# Altium PCB flight_controller.PcbDoc (part 2 of 2)
Units mm, origin at the board's own origin, x right, y up, seen from the top; angles counter-clockwise.
Board outline 36.5 x 36.5 mm, 4 copper layers (Top Layer, GND, Power, Bottom Layer), stack 0.568 mm thick; 81 components, 78 nets, 350 pads, 113 vias.
Unrouted connection lines stored in the file: 37.
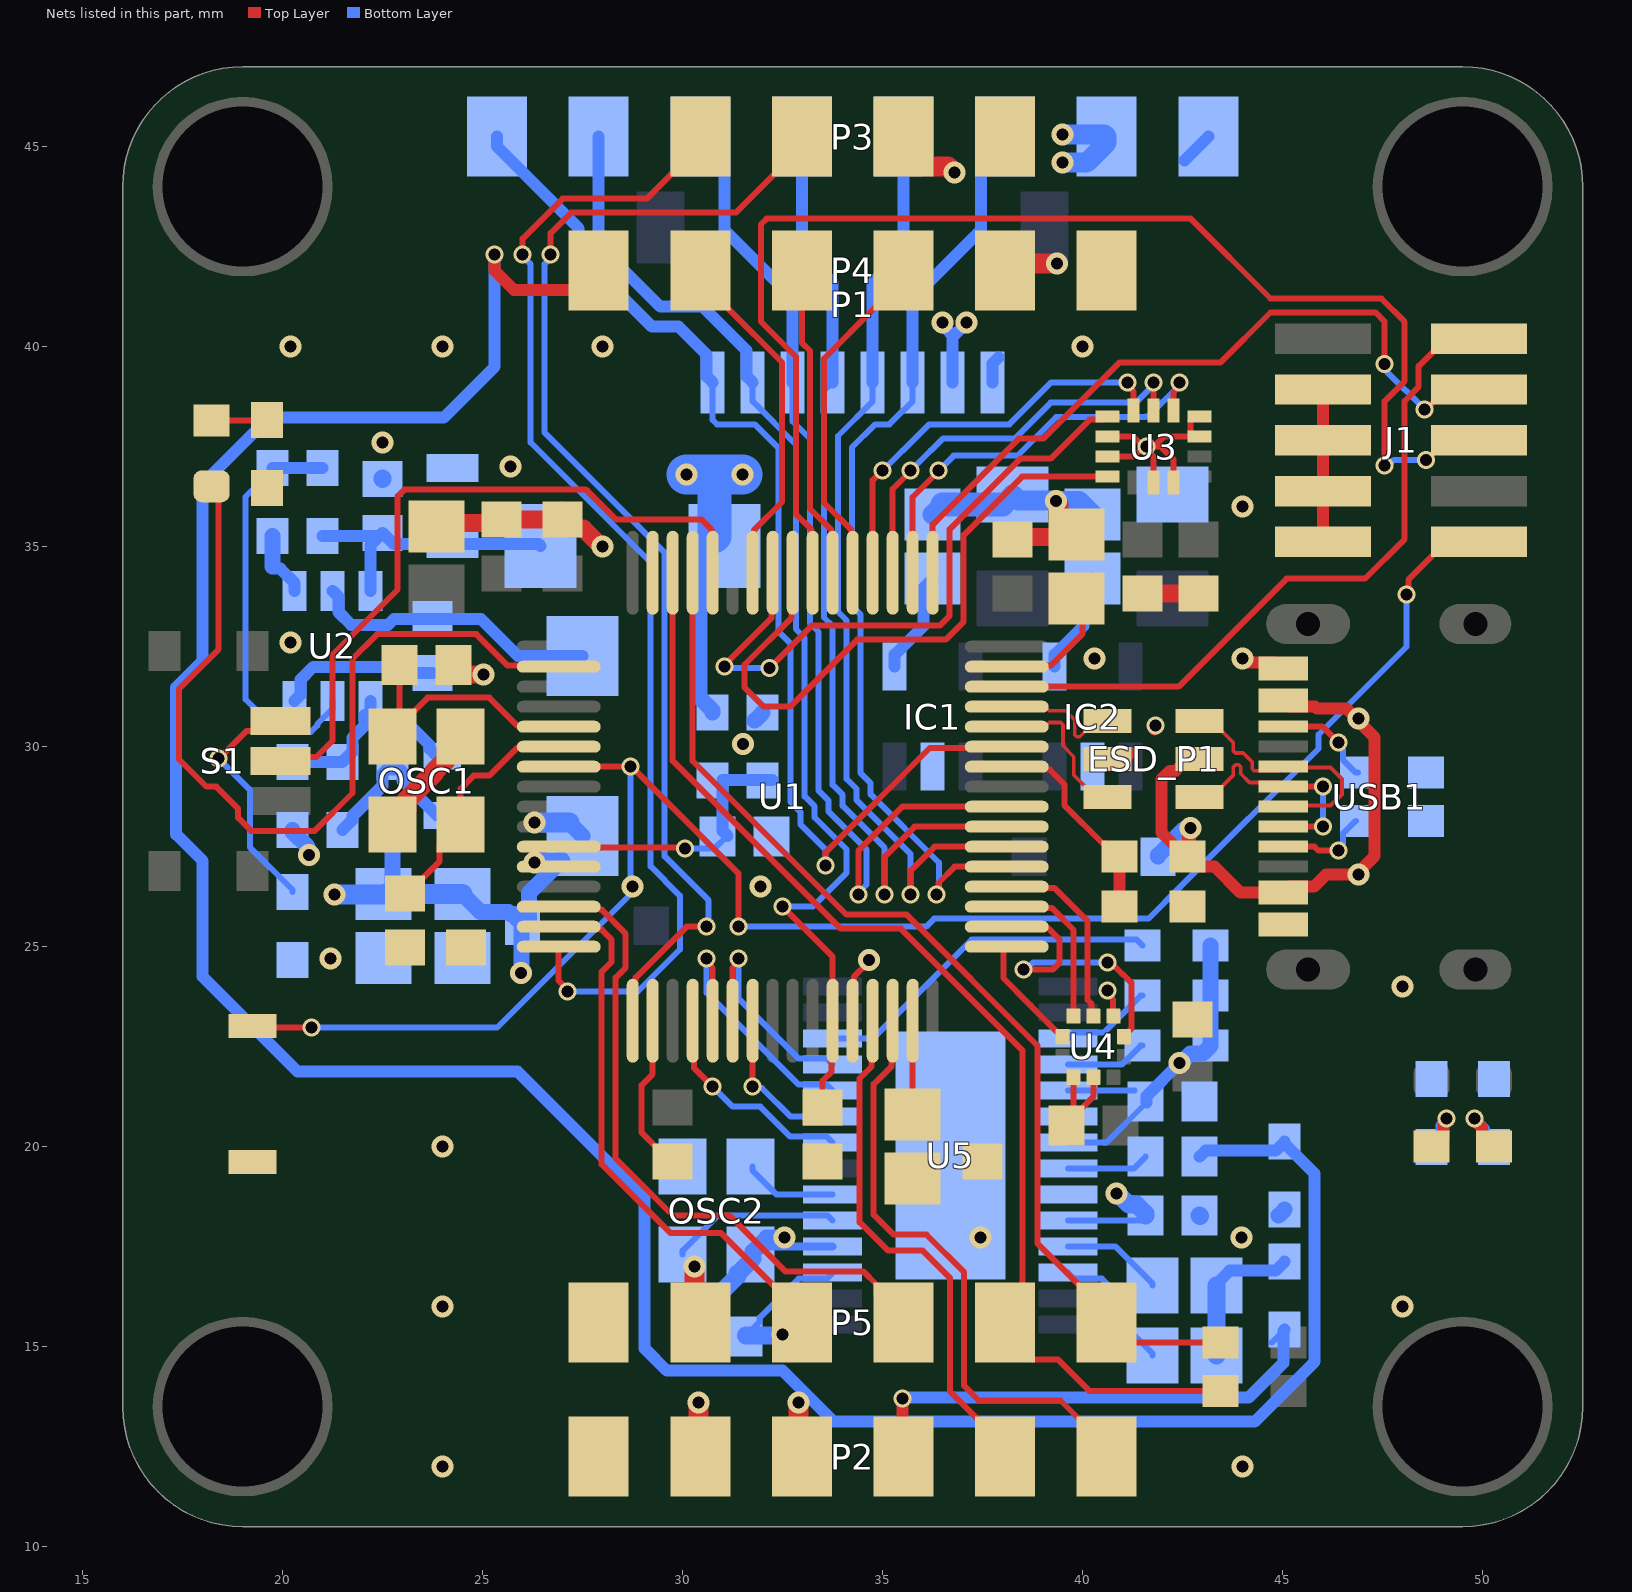
[diagram p4: the nets of this part, all layers, seen from the top]

## Via types
v1: diameter 0.45, hole 0.3, Top Layer to Bottom Layer, tented both sides, 44 vias
v2: diameter 0.55, hole 0.3, Top Layer to Bottom Layer, tented both sides, 25 vias
v3: diameter 0.55, hole 0.3, Top Layer to Power, tented both sides, 21 vias
v4: diameter 0.55, hole 0.3, Power to Bottom Layer, tented both sides, 18 vias
v5: diameter 0.55, hole 0.3, Top Layer to Bottom Layer, tented top, 2 vias
v6: diameter 0.55, hole 0.3, Top Layer to GND, tented both sides, 1 vias
v7: diameter 0.45, hole 0.3, Top Layer to GND, tented both sides, 1 vias
v8: diameter 0.55/0.55/0.55/0.55 (per signal layer), hole 0.3, Top Layer to Bottom Layer, tented both sides, 1 vias

## Nets (pads, with @x,y where several pads share a name; then routed paths per layer and width w, separated by ;. In a path a pad name is that pad's centre, name@x,y a point inside that pad or via, vN(x,y) a via of type N, cw(c..) or ccw(c..) an arc to the next point about the centre after c; other vN are vias at no path point) (continued)
+5V_Reg: C11.2 C12.2 C28.2 C31.1 C33.1 D3.1 L1.2 P2.5 P3.3 P4.5 P5.5 R2.2 R19.2 R20.2 R21.2 U5.3 U5.19 U5.21 U5.24 | length 33.2
  Top Layer w0.5: v3(30.3,17) 30.3,15.39 P5.5@30.356,15.334 ; P2.5@30.4,12.29 v3(30.4,13.6) ; P3.3@35.52,45.25 35.52,45 36.02,44.5 36.637,44.5 36.786,44.35 v3(36.8,44.35) ; P4.5@38.06,42.25 38.225,42.085 v3(39.357,42.085)
  Bottom Layer w0.15: C28.2@31.55,15.25 31.581,15.281 31.925,15.625 31.925,15.725 32.737,16.537 32.737,16.539 32.899,16.7 33.6,16.7 U5.3@33.75,16.85 ; U5.24@39.626,18.15 C33.1@41.45,18.15 ; U5.21@39.626,20.1 40.586,20.1 C31.1@41.593,21.107 ; U5.19@39.626,21.4 C31.1@41.3,21.4
  Bottom Layer w0.3: C31.1@41.593,21.107 41.593,21.266 v4(42.424,22.097)
  Bottom Layer w0.4: C12.2@22.743,26.549 R2.2@22.743,27.924 ; C11.2@24.493,26.324 24.943,25.874 25.643,25.874 25.713,25.804 25.753,25.804 25.993,25.564 D3.1@25.993,25.524 ; v4(25.951,24.349) 25.972,24.37 25.972,25.503 D3.1@25.993,25.524 ; L1.2@26.944,27.125 26.152,26.333 26.152,25.683 D3.1@25.993,25.524 ; L1.2@27.167,28.1 L1.2@27.493,27.774 ; v4(42.424,22.097) 42.465,22.097 42.693,22.325 43,22.325 R21.2@43.2,22.525 ; R21.2@43.2,22.575 R20.2@43.2,23.775 R19.2@43.2,25.025
  Bottom Layer w0.45: C28.2@31.581,15.281 32.481,15.281 v4(32.5,15.3) ; v4(40.85,18.825) 40.877,18.825 41.152,18.55 41.35,18.55 41.575,18.325 C33.1@41.575,18.275
  Bottom Layer w0.5: v4(21.3,26.3) 21.31,26.31 22.504,26.31 C12.2@22.518,26.324 C11.2@24.493,26.324 ; v4(26.3,27.1) 26.919,27.1 L1.2@26.944,27.125 ; v4(26.3,28.1) L1.2@27.167,28.1
+5V_USB: D4.1 ESD_P1.5 R7.2 USB1.A4B9 USB1.B4A9 | length 16.1
  Top Layer w0.3: R7.2@42.573,27.25 41.973,27.85 41.973,29.193 42.178,29.398 42.323,29.398 ESD_P1.5@42.623,29.698 ; R7.2@42.623,27.25 42.873,27 43.296,27 43.946,26.35 USB1.A4B9@45.016,26.35 45.166,26.5 45.781,26.5 46.081,26.8 v3(46.9,26.8) 46.9,26.868 47.3,27.268 47.3,30.232 46.9,30.632 v3(46.9,30.7) 46.852,30.7 46.599,30.952 45.851,30.952 45.803,31 45.166,31 USB1.B4A9@45.016,31.15
  Top Layer w0.35: R7.2@42.573,27.25 42.662,27.339 42.662,27.934 v2(42.7,27.973)
  Bottom Layer w0.4: D4.1@41.885,27.25 41.885,27.29 42.539,27.944 42.671,27.944 v2(42.7,27.973)
+VBAT: D1.1 P1.7 P2.4 pad.6@40.6,45.25 R10.2 | length 13.6
  Top Layer w0.5: v3(32.9,13.6) 32.9,12.33 P2.4@32.98,12.25
  Bottom Layer w0.3: v4(36.5,40.6) 36.5,40.532 36.697,40.335 ; P1.7@36.75,39.11 36.75,40.251 v4(37.099,40.6)
  Bottom Layer w0.4: R10.2@30.75,30.85 30.75,30.9 30.425,31.225 30.425,34.892 D1.1@30.8,35.267
  Bottom Layer w0.5: v4(39.5,44.6) 40.1,44.6 40.6,45.1 pad.6@40.6,45.25 40.55,45.3 v4(39.5,45.3)
  Bottom Layer w0.85: D1.1@30.8,35.267 30.8,36.8
  Bottom Layer w1: v4(30.1,36.8) 30.8,36.8 v4(31.5,36.8)
ADC_BATT: C22.2 R10.1 R11.2 U1.11 | length 7.1
  Top Layer w0.15: U1.11@26.9,27.5 26.92,27.48 30.039,27.48 v1(30.059,27.459)
  Bottom Layer w0.15: v1(30.059,27.459) 30.803,27.459 C22.2@31.118,27.774
  Bottom Layer w0.3: C22.2@31.118,27.774 30.993,27.899 30.993,29.174 R11.2@32.243,29.174
ADC_CURR: C16.2 P1.2 pad.6@27.9,45.25 U1.27 | length 29.2
  Top Layer w0.15: v1(32.5,26) 33.75,24.75 U1.27@33.75,23.15 33.721,23.121 33.721,21.876 33.5,21.655 C16.2@33.5,20.975
  Bottom Layer w0.15: P1.2@31.75,39.11 31.75,38.635 32.833,37.553 32.833,32.939 33.05,32.722 33.05,28.759 33.3,28.509 33.3,28.231 34.1,27.431 34.1,26.849 33.251,26 v1(32.5,26)
  Bottom Layer w0.3: pad.6@27.9,45.25 27.9,42.54 29.44,41 30.5,41 31.6,39.9 31.6,39.26 P1.2@31.75,39.11
AT7456E_LOS: R19.1 U5.12 | length 8.8
  Bottom Layer w0.15: U5.12@33.75,22.7 34.749,22.7 37.224,25.175 41.35,25.175 R19.1@41.5,25.025
AT7456E_MISO: U1.22 U5.11 | length 5.6
  Top Layer w0.15: U1.22@31.25,23.15 31.25,24.469 31.4,24.619 v1(31.4,24.7)
  Bottom Layer w0.15: v1(31.4,24.7) 31.4,23.699 32.899,22.2 33.6,22.2 U5.11@33.75,22.05
AT7456E_MOSI: U1.23 U5.9 | length 4
  Top Layer w0.15: v1(31.75,21.5) U1.23@31.75,23.15
  Bottom Layer w0.15: v1(31.75,21.5) 31.785,21.465 31.981,21.465 32.696,20.75 U5.9@33.75,20.75
AT7456E_nCS: U1.20 U5.8 | length 5.4
  Top Layer w0.15: U1.20@30.25,23.15 30.279,23.121 30.279,21.971 v1(30.75,21.5)
  Bottom Layer w0.15: v1(30.75,21.5) 31.25,21 31.939,21 32.689,20.25 33.6,20.25 U5.8@33.75,20.1
AT7456E_nHS: R21.1 U5.18 | length 2.1
  Bottom Layer w0.15: U5.18@39.626,22.05 40.975,22.05 41.45,22.525 R21.1@41.5,22.525
AT7456E_nVS: R20.1 U5.17 | length 2.3
  Bottom Layer w0.15: U5.17@39.626,22.7 39.776,22.85 40.525,22.85 41.45,23.775 R20.1@41.5,23.775
AT7456E_SCK: U1.21 U5.10 | length 6.6
  Top Layer w0.15: v1(30.6,24.7) 30.6,24.619 30.75,24.469 U1.21@30.75,23.15
  Bottom Layer w0.15: v1(30.6,24.7) 30.6,23.849 32.899,21.55 33.6,21.55 U5.10@33.75,21.4
BMP388_CSB: U1.33 U4.6 | length 2.9
  Top Layer w0.15: U1.33@38.1,25 38.083,25 38.013,24.931 38.013,24.218 38.69,23.541 39.366,22.865 39.4,22.865 39.5,22.765 U4.6@39.5,22.75
BMP388_MISO: U1.35 U4.5 | length 4.1
  Top Layer w0.15: U1.35@38.1,26 38.129,25.971 39.223,25.971 39.775,25.419 39.775,23.275 U4.5@39.765,23.265
BMP388_MOSI: U1.36 U4.4 | length 4.8
  Top Layer w0.15: U1.36@38.1,26.5 38.129,26.471 39.287,26.471 40.125,25.633 40.125,23.668 40.215,23.578 40.215,23.315 U4.4@40.265,23.265
BMP388_SCK: U1.34 U4.2 | length 7.4
  Top Layer w0.15: U1.34@38.1,25.5 38.129,25.471 39.13,25.471 39.425,25.176 39.425,24.6 39.25,24.425 v1(38.513,24.425) ; v1(40.625,24.6) 40.704,24.6 40.983,24.321 40.994,24.321 41.215,24.1 41.215,22.95 41.03,22.765 U4.2@41.03,22.75
  Bottom Layer w0.15: v1(38.513,24.425) 38.576,24.425 38.751,24.6 v1(40.625,24.6)
BOOT0: S1.2 U1.60 | length 17.7
  Top Layer w0.15: S1.2@19.95,29.648 20.046,29.743 20.837,29.743 21.243,30.149 21.243,32.3 22.875,33.932 22.875,36.264 23.036,36.425 25.368,36.425 27.575,36.425 27.6,36.4 27.614,36.4 28.339,35.675 30.475,35.675 30.721,35.429 30.721,34.379 U1.60@30.75,34.35
BUCK_BOOT: C8.1 U2.6 | length 4.1
  Bottom Layer w0.3: U2.6@20.293,31.149 20.443,31.299 20.443,31.677 20.764,31.999 22.638,31.999 22.788,31.849 C8.1@23.743,31.849
BUCK_EN: R1.1 R4.2 U2.5 | length 10.3
  Bottom Layer w0.15: R4.2@19.743,36.974 19.743,36.924 19.068,36.249 19.068,31.185 19.879,30.374 20.707,30.374 20.868,30.535 20.868,30.574 21.243,30.949 U2.5@21.243,31.149
  Bottom Layer w0.3: R4.2@19.743,36.974 R1.1@20.993,36.974
BUCK_FB: C13.1 R3.1 R5.2 U2.4 | length 5.3
  Bottom Layer w0.3: R5.2@20.243,29.624 R3.1@21.493,29.624 21.743,29.874 21.743,30.22 22.043,30.52 22.043,30.799 22.193,30.799 22.913,30.799 23.673,30.039 23.673,29.949 23.858,29.764 C13.1@23.993,29.764 ; U2.4@22.193,30.949 U2.4@22.193,31.149
BUCK_SW: C8.2 L1.1 U2.2 | length 7.3
  Bottom Layer w0.3: U2.2@21.243,33.899 21.393,33.749 21.393,33.367 21.711,33.049 22.638,33.049 22.788,33.199 C8.2@23.743,33.199 24.955,33.199 25.88,32.274 L1.1@27.493,32.274
BUCK_VIN: C9.2 C10.1 D1.2 R1.2 U2.3 | length 7.2
  Bottom Layer w0.3: R1.2@20.993,35.274 22.418,35.274 C10.1@22.493,35.349 ; U2.3@22.193,33.899 22.193,35.049 C10.1@22.493,35.349 ; D1.2@26.443,35.024 26.393,35.074 C9.2@24.243,35.074 22.768,35.074 C10.1@22.493,35.349
Camera_Menu: P4.2 U1.58 | length 8.7
  Top Layer w0.15: P4.2@30.44,41.9 30.44,41.65 31.115,40.975 32.483,39.608 32.483,36.115 31.779,35.411 31.779,34.379 U1.58@31.75,34.35
CC1: R15.1 USB1.A5 | length 2.3
  Top Layer w0.15: USB1.A5@45.016,27.5 45.794,27.5 45.894,27.4 v1(46.4,27.4)
  Bottom Layer w0.15: v1(46.4,27.4) 46.4,27.481 46.501,27.582 46.501,27.823 R15.1@46.826,28.148
CC2: R16.1 USB1.B5 | length 2.5
  Top Layer w0.15: USB1.B5@45.016,30.5 46,30.5 v1(46.4,30.1)
  Bottom Layer w0.15: v1(46.4,30.1) 46.4,30.019 46.501,29.918 46.501,29.677 46.826,29.352 R16.1@46.876,29.352
GND: B1.1 C1.1 C2.1 C3.1 C4.1 C5.1 C6.1 C7.1 C9.1 C10.2 C11.1 C12.1 C14.2 C15.2 C16.1 C17.1 C18.1 C19.1 C20.2 C21.2 C22.1 C23.1 C24.1 C25.1 C26.1 C27.1 C28.1 C31.2 C33.2 ESD_P1.2 IC1.2 IC2.2 J1.3 J1.5 J1.7 J1.9 OSC1.2 OSC1.4 OSC2.2 OSC2.4 P1.8 P2.6 P3.4 P4.6 P5.6 pad.6@43.14,45.25 R4.1 R5.1 R8.1 R9.1 R11.1 R12.1 R13.1 R14.1 R15.2 R16.2 R18.2 U1.12 U1.18 U1.28 U1.63 U2.1 U3.2 U3.3 U3.6 U3.7 U3.10 U3.11 U4.3 U4.8 U4.9 U5.4 U5.20 U5.23 U5.29 USB1.A1B12 USB1.B1A12 | length 48.5
  Top Layer w0.15: U1.18@29.25,23.15 29.25,21.814 28.975,21.539 28.975,20.35 29.7,19.625 C6.1@29.75,19.625 ; U1.28@34.25,23.15 34.279,23.179 34.279,24.248 34.658,24.628 v5(34.658,24.668) ; C20.2@39.74,20.725 40.265,21.25 U4.9@40.265,21.735 ; C20.2@39.765,20.7 U4.8@39.765,21.735 ; U3.3@40.623,37.25 41.269,37.25 41.519,37.5 41.269,37.75 U3.2@40.623,37.75 ; v7(40.625,23.9) 40.625,23.819 40.757,23.687 40.757,23.273 U4.3@40.765,23.265 ; v1@41.727,37.546 41.681,37.5 v1(41.6,37.5) 41.6,37.423 41.775,37.248 ; U3.6@41.773,36.6 41.773,37.246 ; U3.7@42.273,36.6 42.273,37.175 41.948,37.5 41.773,37.5 42.023,37.75 U3.10@42.923,37.75 42.773,37.75 42.698,37.825 42.698,38.175 42.773,38.25 U3.11@42.923,38.25
  Top Layer w0.3: C2.1@27,35.98 C2.1@27,35.675 27.325,35.675 27.325,35.4 C2.1@27.35,35.375 ; ESD_P1.2@40.623,29.698 40.773,29.848 ESD_P1.2@41.218,29.848 ; v1@41.796,30.426 41.796,30.496 v1(41.825,30.525) ; v2@43.9,32.2 44.068,32.2 44.168,32.1 44.835,32.1 USB1.B1A12@45.001,31.935 ; J1.9@46.006,35.123 J1.9@46.008,35.12 J1.3@46.008,38.93
  Top Layer w0.45: C1.1@23.85,35.5 23.937,35.587 25.387,35.587 C3.1@25.475,35.675 C2.1@27,35.675 27.225,35.45 27.523,35.45 27.973,35 v2(28,35) ; C19.1@24.475,31.81 v2@25.015,31.81 ; C5.1@38.25,35.175 38.313,35.237 39.737,35.237 C27.1@39.8,35.3 ; C15.2@41.5,33.825 C14.2@42.9,33.825
  Top Layer w0.5: OSC1.2@22.75,28.05 23.1,28.4 23.1,28.663 23.787,29.349 23.787,29.363 ; 23.796,29.386 24.1,29.69 24.1,29.887 OSC1.4@24.45,30.237 ; v2@25.015,31.81 v2(25.025,31.8) ; v8(39.333,36.147) 39.333,36.133 39.4,36.066 39.4,35.7 C27.1@39.8,35.3
  Bottom Layer w0.2: OSC2.2@31.75,17.2 32.05,17.5 U5.4@33.75,17.5
  Bottom Layer w0.3: 19.75,34.5 19.798,34.452 19.94,34.452 20.293,34.099 U2.1@20.293,33.899 ; P1.8@37.75,39.11 37.75,39.585 P1.8@37.9,39.735 ; pad.6@42.54,44.65 pad.6@43.14,45.25
  Bottom Layer w0.4: R4.1@19.746,35.27 19.746,34.504 19.75,34.5 ; R5.1@20.243,27.924 20.243,27.874 20.623,27.494 20.623,27.327 v2(20.651,27.299) ; OSC2.2@31.75,17.2 31.75,17.375 32.1,17.725 v5(32.538,17.725) ; R11.1@31.8,30.65 R11.1@32,30.85 ; R18.2@44.9,18.275 R18.2@45.05,18.425
  Bottom Layer w0.45: C10.2@22.493,36.699 C10.2@22.496,36.702 ; v2@22.496,37.596 v2(22.5,37.6) ; C28.1@30.2,15.25 30.425,15.475 30.425,15.824 31.375,16.774 31.375,16.825 OSC2.2@31.75,17.2 ; C33.2@42.925,18.275 C33.2@42.937,18.262
  Bottom Layer w0.5: C17.1@36.25,35.8 C17.1@36.5,36.05 ; C18.1@38,36.05 C18.1@38.25,36.3 38.394,36.156 39.324,36.156 v8(39.333,36.147) 39.343,36.137 39.913,36.137 C25.1@40.25,35.8
  Bottom Layer w0.6: C17.1@36.5,36.05 C18.1@38,36.05
  other v2: 24,12 44,12 24,16 48,16 37.45,17.725 43.975,17.725 24,20 48,24 21.2,24.7 31.95,26.5 31.512,30.067 40.3,32.2 44,32.2 20.2,32.6 44,36 25.7,37 20.2,40 24,40 28,40 40,40
  other v6: 28.75,26.5
I2C1_SCL: P5.1 R23.2 U1.61 | length 27
  Top Layer w0.15: U1.61@30.25,34.35 30.25,29.643 34.093,25.8 35.596,25.8 38.865,22.531 38.865,21.139 38.865,17.585 40.6,15.85 P5.1@40.6,15.6 41.098,15.102 R23.2@43.45,15.102
I2C1_SDA: P5.2 R22.2 U1.62 | length 30
  Top Layer w0.15: U1.62@29.75,34.35 29.75,29.648 33.948,25.45 35.451,25.45 38.5,22.401 38.5,15.69 38.11,15.3 P5.2@38.06,15.35 ; P5.2@38.06,15.6 P5.2@38.06,15.35 ; R22.2@43.45,13.898 40.163,13.898 39.386,14.675 38.735,14.675 P5.2@38.06,15.35
IMU_CSB: U1.50 U3.12 | length 10.5
  Top Layer w0.15: U1.50@35.75,34.35 35.75,36.243 36.4,36.893 v1(36.4,36.9) ; U3.12@42.273,38.4 42.273,38.874 42.423,39.024 v1(42.423,39.1)
  Bottom Layer w0.15: v1(36.4,36.9) 36.775,37.275 38.368,37.275 39.333,38.24 41.563,38.24 41.573,38.25 41.63,38.25 42.423,39.043 v1(42.423,39.1)
IMU_EXTI: U1.56 U3.4 | length 16.3
  Top Layer w0.15: U1.56@32.75,34.35 32.721,34.321 32.721,33.228 31.55,32.057 31.55,31.475 32.025,31 32.687,31 34.362,32.675 36.571,32.675 37.025,33.129 37.025,35.289 38.486,36.75 U3.4@40.623,36.75
IMU_MISO: U1.52 U3.14 | length 10.5
  Top Layer w0.15: U1.52@34.75,34.35 34.75,36.662 34.988,36.9 v1(35,36.9) ; v1(41.123,39.1) 41.123,39.024 41.273,38.874 U3.14@41.273,38.4
  Bottom Layer w0.15: v1(35,36.9) 35,36.907 35.493,37.4 35.5,37.4 36.16,38.06 38.164,38.06 39.204,39.1 v1(41.123,39.1)
IMU_MOSI: U1.57 U3.1 | length 16.3
  Top Layer w0.15: v1(31.05,32) 31.05,32.052 32.221,33.223 32.221,34.321 U1.57@32.25,34.35 ; v1(32.174,31.974) 33.225,33.025 36.426,33.025 36.675,33.274 36.675,35.434 38.441,37.2 39.2,37.2 40.175,38.175 40.548,38.175 U3.1@40.623,38.25
  Bottom Layer w0.15: v1(31.05,32) 31.076,31.974 v1(32.174,31.974)
IMU_SCK: U1.51 U3.13 | length 10.4
  Top Layer w0.15: U1.51@35.25,34.35 35.25,36.443 35.7,36.893 v1(35.7,36.9) ; U3.13@41.773,38.4 v1(41.773,39.1)
  Bottom Layer w0.15: v1(35.7,36.9) 35.7,36.907 36.193,37.4 36.2,37.4 36.51,37.71 38.309,37.71 39.198,38.6 41.33,38.6 41.704,38.973 41.704,39.096 v1@41.7,39.1
LDO1_BYP: C17.2 IC1.4 | length 2.6
  Bottom Layer w0.3: IC1.4@35.3,32 35.3,32.3 36.024,33.024 36.024,33.974 C17.2@36.25,34.2
LDO2_BYP: C25.2 IC2.4 | length 2.6
  Bottom Layer w0.3: IC2.4@39.3,32 39.3,32.3 40.024,33.024 40.024,33.974 C25.2@40.25,34.2
LED1: D6.A U1.2 | length 22
  Top Layer w0.15: D6.A@18.223,36.511 18.398,36.336 18.398,32.439 17.412,31.453 17.412,29.681 18.093,29 18.341,29 18.888,28.453 18.888,28.221 19.21,27.899 20.799,27.899 21.743,28.843 21.743,32.197 22.361,32.815 24.839,32.815 25.625,32.028 26.872,32.028 U1.2@26.9,32
M1: P1.6 pad.6@38.06,45.25 U1.37 | length 23.9
  Top Layer w0.15: v1(36.35,26.3) 36.393,26.343 36.393,26.593 36.8,27 U1.37@38.1,27
  Bottom Layer w0.15: P1.6@35.75,39.11 35.75,38.635 35.525,38.41 35.514,38.41 35.164,38.06 34.81,38.06 34.233,37.483 34.233,33.519 34.45,33.302 34.45,29.339 34.7,29.089 34.7,28.811 36.407,27.104 36.407,26.357 v1(36.35,26.3)
  Bottom Layer w0.3: P1.6@35.75,39.11 35.75,41.213 37.46,42.923 37.46,44.65 pad.6@38.06,45.25
M2: P1.5 pad.6@35.52,45.25 U1.38 | length 23.6
  Top Layer w0.15: v1(35.7,26.3) 35.7,26.9 36.3,27.5 U1.38@38.1,27.5
  Bottom Layer w0.15: P1.5@34.75,39.11 34.75,38.635 33.883,37.768 33.883,33.374 34.1,33.157 34.1,29.194 34.35,28.944 34.35,28.666 35.7,27.316 v1(35.7,26.3)
  Bottom Layer w0.3: P1.5@34.75,39.11 34.75,41.608 35.52,42.378 pad.6@35.52,45.25
M3: P1.4 pad.6@32.98,45.25 U1.39 | length 24.3
  Top Layer w0.15: v1(35.05,26.3) 35.05,27.25 35.8,28 U1.39@38.1,28
  Bottom Layer w0.15: P1.4@33.75,39.11 33.533,38.893 33.533,33.229 33.75,33.012 33.75,29.049 34,28.799 34,28.521 35.05,27.471 v1(35.05,26.3)
  Bottom Layer w0.3: pad.6@32.98,45.25 32.98,42.378 33.75,41.608 P1.4@33.75,39.11
M4: P1.3 pad.6@30.44,45.25 U1.40 | length 26
  Top Layer w0.15: v1(34.4,26.3) 34.4,27.408 35.492,28.5 U1.40@38.1,28.5
  Bottom Layer w0.15: P1.3@32.75,39.11 32.75,38.13 33.183,37.698 33.183,33.084 33.4,32.867 33.4,28.904 33.65,28.654 33.65,28.376 34.6,27.426 34.6,26.557 34.4,26.357 v1(34.4,26.3)
  Bottom Layer w0.3: pad.6@30.44,45.25 31.04,44.65 31.04,42.923 32.75,41.213 P1.3@32.75,39.11
MCU_OSC_IN: C19.2 OSC1.1 U1.5 | length 6.5
  Top Layer w0.15: OSC1.1@22.75,30.25 22.75,30.35 23.625,31.225 25.164,31.225 25.86,30.529 26.871,30.529 U1.5@26.9,30.5 ; OSC1.1@22.925,30.425 C19.2@22.925,32.04
MCU_OSC_OUT: C23.2 OSC1.3 U1.6 | length 6.1
  Top Layer w0.15: C23.2@23.06,26.325 23.11,26.325 23.925,27.14 23.925,27.525 OSC1.3@24.45,28.05 24.45,28.95 24.775,29.275 25.164,29.275 25.86,29.971 26.871,29.971 U1.6@26.9,30
NetC13_2: C13.2 R2.1 R3.2 | length 4.2
  Bottom Layer w0.3: R3.2@21.493,27.924 21.743,28.174 21.743,28.269 22.493,29.019 22.493,29.324 22.595,29.426 R2.1@22.9,29.426 ; R2.1@22.743,29.624 22.993,29.374 22.993,29.149 23.858,28.284 C13.2@23.993,28.284
NetC29_1: C29.1 C30.1 R17.2 | length 3.7
  Bottom Layer w0.3: C30.1@43.35,16.575 43.675,16.9 44.825,16.9 R17.2@45.05,17.125
  Bottom Layer w0.45: C29.1@43.35,14.775 C30.1@43.35,16.525
NetC32_1: C32.1 U5.22 | length 2.1
  Bottom Layer w0.15: U5.22@39.626,19.45 41.275,19.45 C32.1@41.575,19.75
NetD2_2: D2.K R9.2 | length 1.7
  Top Layer w0.3: D2.K@48.723,20.003 48.773,20.003 49.023,20.253 49.023,20.582 49.1,20.659 v1(49.1,20.7)
  Bottom Layer w0.3: R9.2@48.723,19.99 48.973,20.24 48.973,20.532 49.1,20.659 v1(49.1,20.7)
NetD5_2: D5.K R12.2 | length 1.8
  Top Layer w0.3: v1(49.792,20.7) 49.792,20.659 49.977,20.474 49.977,20.253 50.227,20.003 D5.K@50.277,20.003
  Bottom Layer w0.3: v1(49.792,20.7) 49.792,20.685 50.027,20.449 50.027,20.24 R12.2@50.277,19.99
NetD6_2: D6.K R14.2 | length 1.4
  Top Layer w0.15: D6.K@18.223,38.161 19.589,38.161 R14.2@19.602,38.174
NetR13_2: R13.2 S1.1 | length 6
  Top Layer w0.15: v1(18.4,29.7) 19.09,30.39 19.692,30.39 S1.1@19.95,30.648
  Bottom Layer w0.15: v1(18.4,29.7) 19.188,28.912 19.188,27.479 20.243,26.424 R13.2@20.243,26.374
NRST: B1.2 J1.10 U1.7 | length 44.6
  Top Layer w0.15: B1.2@19.25,23.021 19.296,22.975 v1(20.725,22.975) ; U1.7@26.9,29.5 v1(28.7,29.5) 28.726,29.5 31.4,26.826 v1(31.4,25.5) ; v1(48.1,33.8) 48.138,33.838 48.138,34.171 49.088,35.12 J1.10@49.908,35.12
  Bottom Layer w0.15: v1(20.725,22.975) 25.355,22.975 28.7,26.32 v1(28.7,29.5) ; v1(31.4,25.5) 36.087,25.5 36.287,25.7 41.644,25.7 42.439,26.495 45.9,29.956 45.9,30.307 48.1,32.507 v1(48.1,33.8)
OSD_OSC_IN: OSC2.3 U5.5 | length 4.3
  Bottom Layer w0.15: OSC2.3@30,17.3 30,17.4 30.875,18.275 33.625,18.275 U5.5@33.75,18.15
OSD_OSC_OUT: OSC2.1 U5.6 | length 2.3
  Bottom Layer w0.15: OSC2.1@31.75,19.5 31.75,19.4 32.35,18.8 U5.6@33.75,18.8
OSD_SAG: C30.2 U5.25 | length 2.6
  Bottom Layer w0.15: U5.25@39.626,17.5 40.825,17.5 41.75,16.575 C30.2@41.75,16.525
OSD_VOUT: C29.2 U5.26 | length 3.4
  Bottom Layer w0.15: U5.26@39.626,16.85 39.776,16.7 40.477,16.7 40.732,16.446 40.732,15.804 41.136,15.4 41.175,15.4 41.75,14.825 C29.2@41.75,14.775
RX1: P1.1 pad.6@25.36,45.25 U1.43 | length 28.5
  Top Layer w0.15: v1(33.572,27.028) 33.574,27.03 33.574,27.363 36.182,29.971 38.071,29.971 U1.43@38.1,30
  Bottom Layer w0.15: P1.1@30.75,39.11 30.75,38.168 30.857,38.06 31.8,38.06 32.4,37.46 32.4,32.877 32.7,32.577 32.7,28.614 32.95,28.364 32.95,28.05 33.572,27.428 v1(33.572,27.028)
  Bottom Layer w0.3: pad.6@25.36,45.25 25.36,45 27.4,42.96 27.4,42.333 29.233,40.5 29.9,40.5 30.6,39.8 30.6,39.26 P1.1@30.75,39.11
RX2: P3.2 U1.17 | length 30
  Top Layer w0.15: v1(26.7,42.3) 26.7,42.839 27.211,43.35 31.33,43.35 32.23,44.25 32.98,45 P3.2@32.98,45.25 ; U1.17@28.75,23.15 28.75,24.091 28.825,24.166 28.825,24.226 30.099,25.5 v1(30.6,25.5)
  Bottom Layer w0.15: v1(26.7,42.3) 26.7,42.219 26.55,42.069 26.55,37.85 29.55,34.85 29.55,27.262 30.65,26.162 30.65,25.55 v1(30.6,25.5)
RX3: P2.1 U1.30 | length 15.2
  Top Layer w0.15: U1.30@35.25,23.15 35.221,23.121 35.221,22.01 34.775,21.564 34.775,18.3 35.275,17.8 36.095,17.8 37.035,16.86 37.035,14.02 37.399,13.655 39.444,13.655 40.6,12.5 P2.1@40.6,12.25
RX4: P5.4 U1.15 | length 14
  Top Layer w0.15: U1.15@26.9,25.5 27.841,25.5 27.916,25.425 27.976,25.425 28.225,25.176 28.225,24.621 27.975,24.371 27.975,19.561 29.698,17.838 30.962,17.838 32.275,16.525 32.305,16.525 32.98,15.85 P5.4@32.98,15.6
RX5: P4.3 U1.54 | length 7.9
  Top Layer w0.15: P4.3@32.98,41.9 32.98,40.1 33.183,39.898 33.183,35.954 33.721,35.415 33.721,34.379 U1.54@33.75,34.35
SWCLK: J1.4 U1.49 | length 19
  Top Layer w0.15: U1.49@36.25,34.35 36.25,35.55 38.4,37.7 39.016,37.7 40.916,39.6 43.439,39.6 44.694,40.855 47.322,40.855 47.548,40.629 v1(47.548,39.565) ; v1(48.548,38.434) 48.592,38.434 49.088,38.93 J1.4@49.908,38.93
  Bottom Layer w0.15: v1(47.548,39.565) 47.605,39.508 47.605,39.377 v1(48.548,38.434)
SWDIO: J1.2 U1.46 | length 17.7
  Top Layer w0.15: U1.46@38.1,31.5 42.4,31.5 45.1,34.2 47.057,34.2 48.048,35.191 48.048,38.643 48.4,38.995 48.4,39.512 49.088,40.2 J1.2@49.908,40.2
SWO: J1.6 U1.55 | length 32.9
  Top Layer w0.15: U1.55@33.25,34.35 33.221,34.379 33.221,35.42 32.833,35.809 32.833,39.753 31.955,40.63 31.955,43.055 32.1,43.2 42.7,43.2 44.695,41.205 47.467,41.205 48.05,40.622 48.05,39.14 47.548,38.638 v1(47.548,37.025) ; v1(48.576,37.174) 48.602,37.174 49.088,37.66 J1.6@49.908,37.66
  Bottom Layer w0.15: v1(47.548,37.025) 47.629,37.025 47.778,37.174 v1(48.576,37.174)
TX2: P3.1 U1.16 | length 29.5
  Top Layer w0.15: v1(26,42.3) 26,42.7 27,43.7 29.1,43.7 29.725,44.325 29.765,44.325 30.44,45 P3.1@30.44,45.25 ; U1.16@26.9,25 26.9,24.154 27.118,23.936 v1(27.118,23.882)
  Bottom Layer w0.15: v1(26,42.3) 26,42.262 26.2,42.062 26.2,37.606 29.2,34.606 29.2,27.007 29.928,26.279 29.928,24.93 28.88,23.882 v1(27.118,23.882)
TX3: P2.2 U1.29 | length 13
  Top Layer w0.15: U1.29@34.75,23.15 34.721,23.121 34.721,22.005 34.425,21.709 34.425,18.11 34.61,17.925 35.135,17.4 36,17.4 36.685,16.715 36.685,13.875 38.06,12.5 P2.2@38.06,12.25
TX4: P5.3 U1.14 | length 16.7
  Top Layer w0.15: U1.14@26.9,26 27.841,26 27.916,25.925 27.976,25.925 28.325,25.576 28.325,25.571 28.575,25.321 28.575,24.476 28.325,24.226 28.325,19.706 29.756,18.275 31.172,18.275 32.573,16.875 34.525,16.875 34.845,16.555 34.845,16.275 P5.3@35.52,15.6
TX5: P4.4 U1.53 | length 8.7
  Top Layer w0.15: U1.53@34.25,34.35 34.221,34.379 34.221,35.41 33.533,36.099 33.533,39.704 34.804,40.975 34.845,40.975 35.52,41.65 P4.4@35.52,41.9
USB_CON_D_N: ESD_P1.4 USB1.A7 USB1.B7 | length 5.8
  Top Layer w0.09: ESD_P1.4@42.923,28.748 43.223,28.748 43.768,29.293 43.768,29.5 43.821,29.553 43.895,29.553 43.948,29.5 43.948,29.328 44.171,29.105 44.388,29.105 44.911,29.105 USB1.A7@45.016,29
  Top Layer w0.15: USB1.B7@45.016,28 v1(46.001,28) ; USB1.A7@45.016,29 v1(46.001,29)
  Bottom Layer w0.15: v1(46.001,28) v1(46.001,29)
USB_CON_D_P: ESD_P1.6 USB1.A6 USB1.B6 | length 6.4
  Top Layer w0.09: ESD_P1.6@42.923,30.648 43.223,30.648 43.768,30.103 43.768,29.895 43.821,29.843 44.015,29.843 44.238,29.62 44.238,29.448 44.291,29.395 44.365,29.395 44.911,29.395 USB1.B6@45.016,29.5
  Top Layer w0.1: USB1.A6@45.016,28.5 45.041,28.525 46.198,28.525 46.476,28.803 46.476,29.197 46.198,29.475 45.041,29.475 USB1.B6@45.016,29.5
USB_D_N: ESD_P1.3 U1.44 | length 3.9
  Top Layer w0.09: U1.44@38.1,30.5 39.057,30.5 39.162,30.605 39.454,30.605 39.506,30.552 39.506,30.021 39.778,29.749 39.778,29.293 40.323,28.748 ESD_P1.3@40.623,28.748
USB_D_P: ESD_P1.1 U1.45 | length 3.2
  Top Layer w0.09: U1.45@38.1,31 39.057,31 39.162,30.895 39.574,30.895 39.796,30.672 39.796,30.301 39.849,30.248 39.924,30.248 40.323,30.648 ESD_P1.1@40.623,30.648
VBUS: R7.1 R8.2 U1.42 | length 5.3
  Top Layer w0.15: U1.42@38.1,29.5 39.041,29.5 39.116,29.425 39.176,29.425 39.543,29.059 39.543,28.539 40.507,27.575 40.598,27.575 R7.1@40.923,27.25
  Top Layer w0.3: R8.2@40.923,26 R7.1@40.923,27.25
VCAP_1: C24.2 U1.31 | length 2.4
  Top Layer w0.15: C24.2@35.75,20.8 U1.31@35.75,23.15
VCAP_2: C27.2 U1.47 | length 3.1
  Top Layer w0.15: U1.47@38.1,32 38.129,32.029 39.204,32.029 40,32.825 C27.2@40,33.7
Video_In: C32.2 P4.1 R18.1 | length 71.1
  Top Layer w0.3: v1(25.3,42.3) 25.3,41.9 25.776,41.424 27.3,41.424 27.9,42.024 P4.1@27.9,42.25
  Bottom Layer w0.3: v1(25.3,42.3) 25.3,39.5 24.025,38.225 19.649,38.225 18,36.576 18,32.147 17.337,31.484 17.337,27.811 18,27.148 18,24.25 20.374,21.876 25.874,21.876 29.05,18.7 29.05,14.955 29.605,14.4 32.5,14.4 33.775,13.125 44.3,13.125 45.8,14.625 45.8,19.325 R18.1@45.05,20.075 ; C32.2@42.925,19.75 43.075,19.9 44.825,19.9 R18.1@45.05,20.125
Video_Out: P2.3 R17.1 | length 13.5
  Top Layer w0.15: P2.3@35.62,12.425 P2.3@36.195,13
  Top Layer w0.3: v1(35.5,13.7) 35.5,12.445 35.52,12.425 P2.3@35.52,12.25
  Bottom Layer w0.15: R17.1@44.725,15.1 R17.1@45.05,15.425
  Bottom Layer w0.3: v1(35.5,13.7) 35.525,13.725 44.145,13.725 45.015,14.595 45.015,15.39 R17.1@45.05,15.425
pads on no net: J1.8 P1.MP1 P1.MP2 S1.4 S1.5 U1.3 U1.4 U1.8 U1.9 U1.10 U1.24 U1.25 U1.26 U1.41 U1.59 U3.9 U4.7 U5.1 U5.2 U5.7 U5.13 U5.14 U5.15 U5.16 U5.27 U5.28 USB1.1 USB1.2 USB1.3 USB1.4 USB1.A8 USB1.B8

## Polygon pours and split planes (outlines as drawn)
+5V_Reg on Power "Power-+5V_Reg" (solid, pour order 105): 19,25.36 29.812,12.782 31.36,12.782 32.5,14.5 43.7,14.5 43.7,22.267 42.613,23 42.039,23 35.175,18.95 30.332,18.95 27.5,22.411 27.5,28.629 25.856,28.629 25.856,26.525 23.356,26.525 20.658,28.2 20.658,29.581 25.176,34.1 38.1,34.1 38.1,37.821 43.554,43.51 43.554,45.1 40.38,45.1 40.38,43.9 38.2,43.9 38.2,45.1 35.872,45.1 35.872,43.51 37.45,41.932 37.45,40.25 34.381,36.097 24.54,36.097 19,30.557
+3V3 on Power "Power-+3V3" (solid, pour order 116): 43.7,14.5 49.5,14.5 49.5,23.5 49.495,23.5 48,24.995 48,25.983 42.2,25.983 42.2,31.4 48,31.4 45.315,40.4 43.55,40.4 43.55,34.1 25.176,34.1 20.658,29.581 20.658,28.2 23.356,26.525 25.856,26.525 25.856,28.629 32.12,28.629 35.661,31.55 36.964,31.55 40.552,30.018 40.552,25.363 37.897,23.5 27.5,23.5 27.5,22.411 30.332,18.95 35.175,18.95 42.039,23 42.613,23 43.7,22.267
+VBAT on Power "Power-+VBAT" (solid, pour order 103): 16.5,46.5 16.489,36.097 16.5,11 49.5,11 49.5,14.5 32.5,14.5 31.36,12.782 29.812,12.782 19,25.359 19,30.557 24.54,36.097 34.381,36.097 37.45,40.25 37.45,41.932 35.872,43.51 35.872,45.1 38.2,45.1 38.2,43.9 40.38,43.9 40.38,45.1 52,45.1 52,46.5 36,46.5
+5V_USB on Power "+5V_USB_L03_P049" (solid, pour order 49): 42.2,31.4 48,31.4 48,25.983 42.2,25.983
+5V on Power "+5V_L03_P089" (solid, pour order 89): 27.5,23.5 37.896,23.5 40.552,25.371 40.552,30.018 36.964,31.55 35.661,31.55 32.12,28.629 27.5,28.629
+3V3_IMU on Power "Power-+3V3_IMU" (solid, pour order 107): 38.1,34.1 43.55,34.1 43.55,40.4 45.313,40.4 48,31.4 48,24.995 49.5,23.495 49.5,11 52,11 52,45.1 43.554,45.1 43.554,43.51 43.55,43.51 38.1,37.821
GND on Top Layer "GND_L01_P001" (solid, remove dead copper, pour order 1): 16.5,46.5 16.5,11 52,11 52,46.5
GND on Bottom Layer "GND_L04_P002" (solid, remove dead copper, pour order 2): 16.5,46.5 16.5,11 52,11 52,46.5
GND on GND "GND_L02_P117" (solid, pour order 117): 16.5,46.5 16.5,11 52,11 52,46.5

## Other copper
Top Layer:
  rectangle net GND: 41.123,37.1 42.423,37.9
  pour cut-out: 16.5,31.698 16.5,27.479 19.2,27.479 19.2,31.698
  pour cut-out: 28.027,14.6 28.027,13.25 28.65,13.25 28.65,14.6
  pour cut-out: 51.308,34.74 51.308,40.78 47.208,40.78 47.208,34.74
  pour cut-out: 29.69,46.25 29.69,43.25 37.933,43.25 37.933,46.25
  pour cut-out: 26.95,43.25 26.95,40.646 39.85,40.646 39.85,43.25
  pour cut-out: 41.55,11.25 28.65,11.25 28.65,16.854 41.55,16.854
Bottom Layer:
  rectangle net +VBAT: 36.45,39.681 37.05,40.434
  pour cut-out: 24.41,46.25 24.41,44 42.39,44 42.39,46.25

## Silkscreen, mask and mechanical layers (free items; w line width, h text height)
Top Overlay:
  lines w0.254: 23.7,17.314 23.7,21.124 ; 23.7,21.124 22.176,19.6 25.224,19.6 23.7,21.124
  text "T2" at 29.774,43.18 h0.8
  text "R2" at 32.314,43.18 h0.8
  text "5V" at 34.854,43.18 h0.8
  text "G" at 37.793,43.18 h0.8
  text "CAM" at 26.834,39.83 h0.8
  text "CC" at 29.774,39.83 h0.8
  text "R5" at 32.314,39.83 h0.8
  text "T5" at 34.854,39.83 h0.8
  text "5V" at 37.394,39.83 h0.8
  text "G" at 40.333,39.83 h0.8
  text "FLASH" at 16.92,33.168 h0.8
  text "DFU" at 16.92,25.328 h0.8
  text "RST" at 16.92,17.601 h0.8
  text "IMU" at 50.664,17.034 h0.8 r90
  text "PWR" at 49.11,16.9 h0.8 r90
  text "G" at 27.633,16.87 h0.8
  text "5V" at 29.774,16.87 h0.8
  text "RX" at 32.314,16.87 h0.8
  text "T4" at 34.854,16.87 h0.8
  text "SDA" at 36.994,16.87 h0.8
  text "SCL" at 39.534,16.87 h0.8
  text "G" at 27.633,13.52 h0.8
  text "5V" at 29.774,13.52 h0.8
  text "BAT" at 31.914,13.52 h0.8
  text "VTX" at 34.454,13.52 h0.8
  text "T3" at 37.394,13.52 h0.8
  text "R3" at 39.934,13.52 h0.8
Bottom Overlay:
  rectangle: 41.25,39.75 42.242,41.145
  rectangle: 42.5,39.75 43.492,41.145
  rectangle: 43.75,39.75 44.742,41.145
  rectangle: 45,39.75 45.992,41.145
  rectangle: 46.25,39.75 47.242,41.145
  rectangle: 47.5,39.75 48.492,41.145
  rectangle: 48.75,39.75 49.742,41.145
  rectangle: 50,39.75 50.992,41.145
  text "G" at 50.1,38.947 h0.8 r270
  text "M1" at 47.6,38.414 h0.8 r270
  text "M4" at 43.85,38.147 h0.8 r270
  text "M3" at 45.1,38.147 h0.8 r270
  text "M2" at 46.35,38.147 h0.8 r270
  text "TEL" at 41.35,37.347 h0.8 r270
  text "CUR" at 42.6,37.347 h0.8 r270
  text "BAT" at 48.85,37.347 h0.8 r270
Mechanical 1:
  the board outline again, w0.254